# Altium PCB BOOST.PcbDoc
Units mil, origin at the board's own origin, x right, y up, seen from the top; angles counter-clockwise.
Board outline 1058 x 683 mil, 2 copper layers (Top Layer, Bottom Layer); 11 components, 9 nets, 31 pads, 8 vias.
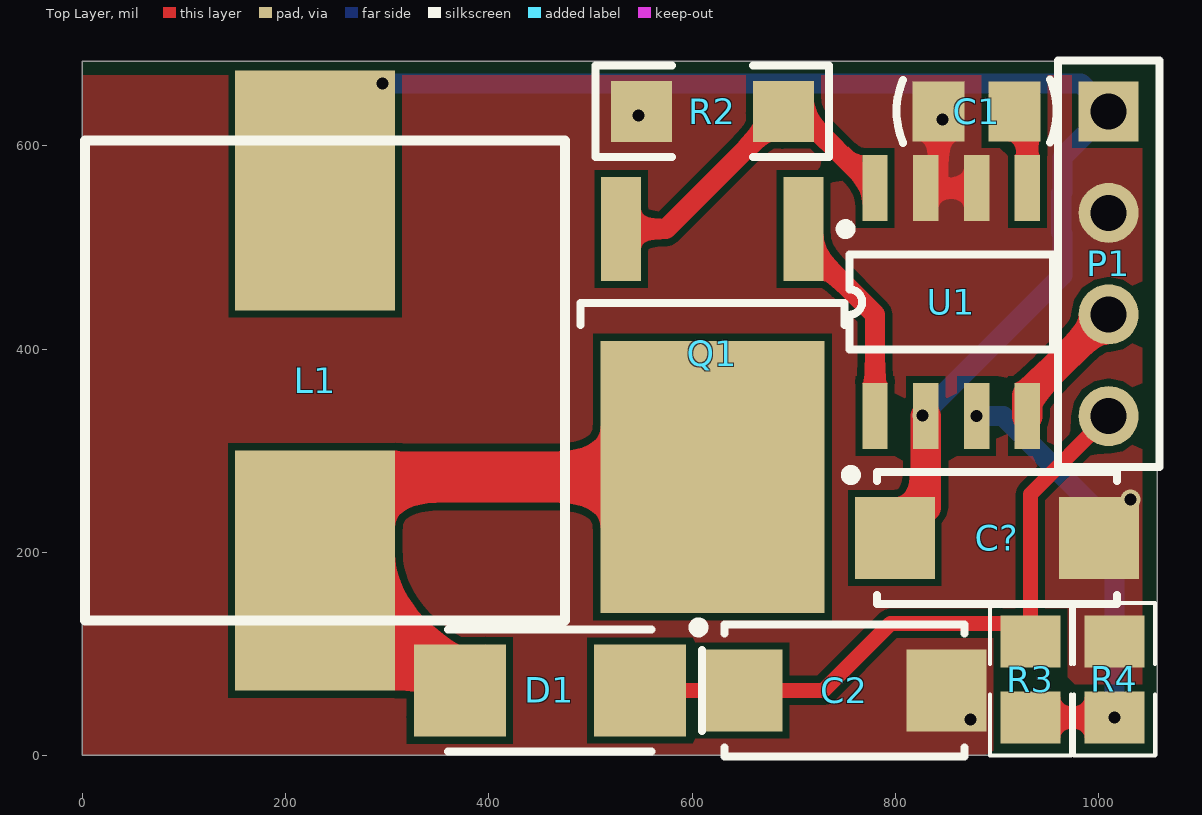
[diagram p0: Top Layer view]
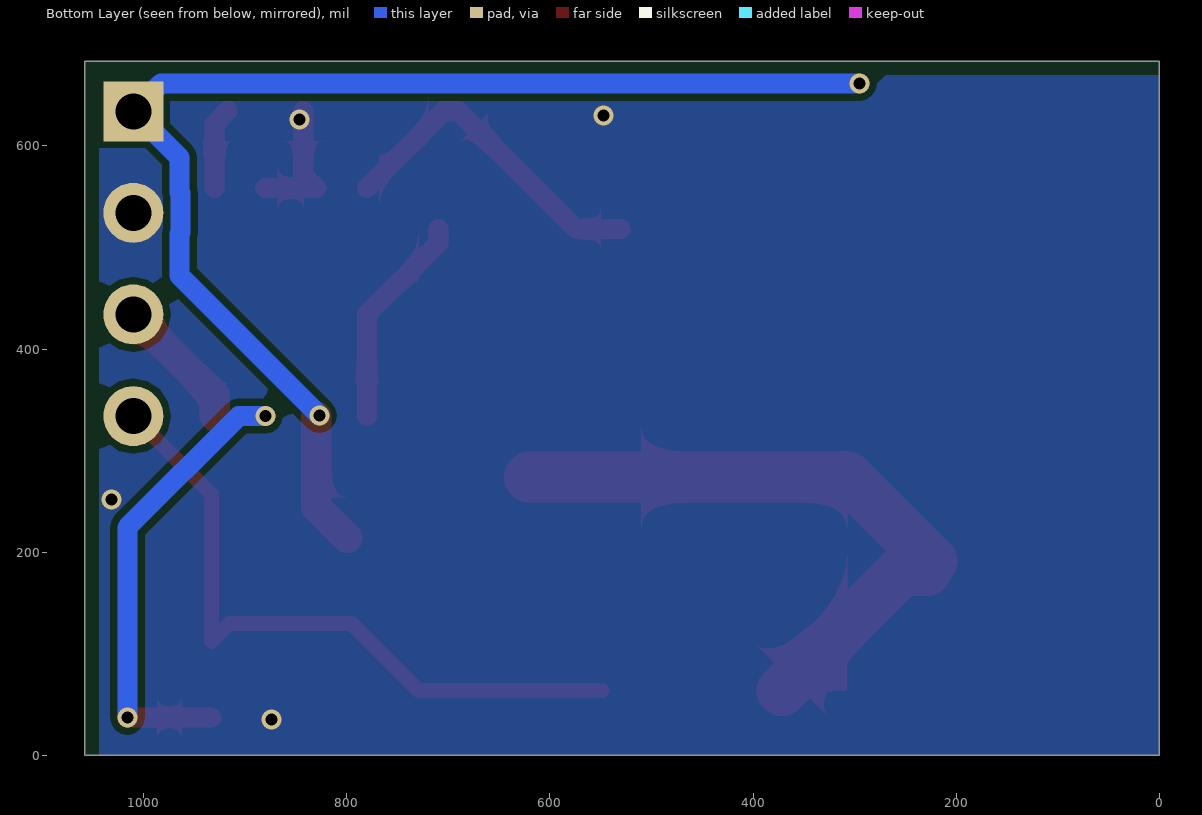
[diagram p1: Bottom Layer view, seen from below]

## Layer stack, top to bottom
Top Solder: solder mask 0.4, Solder Resist, Dk 3.5
Top Layer: signal copper 1.4
Dielectric 1: dielectric 12.6, FR-4, Dk 4.8
Bottom Layer: signal copper 1.4
Bottom Solder: solder mask 0.4, Solder Resist, Dk 3.5

## Board outline
0,0 0,683 1058,683 1058,0

## Design rules (kind name [scope] priority, off if disabled: settings)
Clearance [All] p1: gap=7 ignorepadtopadclearanceinfootprint=FALSE except(0: Arc-Hole Track-Hole SMDPad-Hole THPad-Hole Via-Hole Fill-Hole Poly-Hole Region-Hole Text-Hole)
MinimumSolderMaskSliver [All] p1: minsoldermaskwidth=7
PolygonConnect [All] p1: connectstyle=Direct reliefconductorwidth=118.11 reliefentries=4 polygonreliefangle="90 Angle" airgapwidth=118.11
RoutingCorners [All] p1: cornerstyle=Round minsetback=100 maxsetback=100
RoutingVias [All] p1: holewidth=28 width=50 viastyle="Through Hole" minholewidth=28 minwidth=50 maxholewidth=28 maxwidth=50
SilkToSilkClearance [All] p1 off: silktosilkclearance=10
SilkToSolderMaskClearance [IsPad] p1 off: minsilkscreentomaskgap=10 clearancetoexposedcopper=TRUE
SolderMaskExpansion [All] p1: expansion=4
Width [All] p1: maxlimit=100 minlimit=10 preferedwidth=10
26 further rules are at their usual default settings.

## Components (designator, comment, footprint, x,y, rotation, side; value= is the part's Value field where it differs from the comment)
C1 "100nf/50V/0603" C-RAD-0805 880,634 r180 top
C2 "10uF/10*10/400V" 5032 750,64 r0 top
C? "10uF/10*10/400V" 5032 900,214 r0 top
D1 "D-Schottky" DIODE-SMA 460,64 r0 top
L1 "10*10/150uH" l1212 475.06,605.23 r270 top
P1 "Header 4" HDR1X4_BLUE 1010,634 r270 top
Q1 "MOSFET-N" D-PAK 620,354.71 r270 top
R2 "Res1" 1206 620,634 r0 top value=100K/0603/1%
R3 "Res1" 0805-1 933.07,74.8 r270 top value=100K/0603/1%
R4 "Res1" 0805-1 1015.75,74.8 r90 top value=100K/0603/1%
U1 "MAX1771" sop-8 780,334 r90 top

## Footprints (in the part's own frame and the unit in brackets; to place one, negate y for a bottom-side part, rotate by r counter-clockwise, add the part's x,y. Pads: shape width x height; smd on the part's side, far side on the other; paste and mask are expansions set on the pad)
0805-1 [mm] "贴片带丝印"
  rect 1.3x1.5 smd: 1(-0.95,0) 2(0.95,0)
  silkscreen extent -1.91,-1.02 1.91,1.02, body extent -1.14,-0.51 1.14,0.51, height 1
1206 [mil] "贴片元件"
  rect 60x60 smd: 1(-70,0) 2(70,0)
  silkscreen extent -115,-45 115,45, body extent -75,-35 75,35, height 39
5032 [mm] "XTAL_8M 2-Leads, Body 6.00x3.20mm, IPC Medium Density"
  rect 2x2.05 smd: 1(-2.55,0) 2(2.55,0)
  silkscreen extent -3.77,-1.65 3,1.7, body extent -3,-1.6 3,1.6, height 1.2
C-RAD-0805 [mm] "贴片电容"
  rect 1.3x1.5 smd: 1(-0.95,0) 2(0.95,0)
  silkscreen extent -2,-0.79 2,0.79, body extent -1.27,-0.64 1.27,0.64, height 0.9
D-PAK [mm] "D-PAK, 3-Pads, Body 6.20x6.66mm (max), IPC Medium Density"
  rect 2.6x1 smd: 1(-4.15,2.28) 3(-4.15,-2.28)
  rect 6.8x5.6 smd: 2(2.05,0)
  silkscreen extent -4.27,-3.3 -1.75,3.46, body extent -4.6,-3.3 4.65,3.3, height 2.31
DIODE-SMA [mm] "贴片二极管"
  rect 2.3x2.3 smd: 1(-2.25,0) 2(2.25,0)
  silkscreen extent -2.54,-1.52 3.81,1.52, body extent -2.92,-1.4 2.92,1.4, height 3
HDR1X4_BLUE [mm]
  rect 1.5x1.5 hole 0.9: 1(0,0)
  round 1.5 hole 0.9: 2(2.54,0) 3(5.08,0) 4(7.62,0)
  silkscreen extent -1.27,-1.27 8.89,1.27, body extent -1.27,-1.27 8.89,1.27, height 2
l1212 [mm]
  rect 6x4 smd: 1(1.25,-6.25) 2(10.75,-6.25)
  silkscreen extent 0,-12 12,0
sop-8 [mil]
  rect 65x25 smd: 1(0,0) 2(0,-50) 3(0,-100) 4(0,-150) 5(224.41,-150) 6(224.41,-100) 7(224.41,-50) 8(224.41,0)
  silkscreen extent 65,-175 159,25, body extent -9,-174 229,24, height 63

## Part data
C1: library part C_1
C2 C?: library part CAP
D1: "肖特基二极管", Code_JEDEC=DO-214-AA, LatestRevisionDate=17-Jul-2002, LatestRevisionNote="Re-released for DXP Platform.", PackageReference=SMB, Published=8-Jun-2000, Publisher="Altium Limited", Type=SS14
L1: library part L
P1: "Header, 4-Pin", LatestRevisionDate=17-Jul-2002, LatestRevisionNote="Re-released for DXP Platform.", Publisher="Altium Limited"
Q1: "N-Channel MOSFET", PackageDocument=1995/1996, LatestRevisionDate=17-Jul-2002, LatestRevisionNote="Re-released for DXP Platform.", PackageReference=E3, Published=8-Jun-2000, Publisher="Altium Limited"
R2 R3 R4: "贴片电阻", LatestRevisionDate=17-Jul-2002, LatestRevisionNote="Re-released for DXP Platform.", PackageReference=AXIAL-0.4, Published=8-Jun-2000, Publisher="Altium Limited"

## Via types
v1: diameter 19.68/19.68 (per signal layer), hole 11.81, Top Layer to Bottom Layer, 7 vias
v2: diameter 20/20 (per signal layer), hole 11.81, Top Layer to Bottom Layer, 1 vias

## Nets (pads, with @x,y where several pads share a name; then routed paths per layer and width w, separated by ;. In a path a pad name is that pad's centre, name@x,y a point inside that pad or via, vN(x,y) a via of type N, cw(c..) or ccw(c..) an arc to the next point about the centre after c; other vN are vias at no path point)
12V: C?.1 L1.1 P1.1 U1.2 | length 1234.8
  Top Layer w30: C?.1 830,244.39 U1.2
  Bottom Layer w20: v1(295.28,661.42) 982.58,661.42 P1.1 964.57,588.57 964.57,554.37 963.47,553.27 963.47,514.73 964.57,513.63 964.57,472.44 v2(826.77,334.65)
EN: P1.3 U1.4 | length 133.1
  Top Layer w30: U1.4 930,354 P1.3
GND: C1.2 C2.2 C?.2 P1.2 R2.1 R4.2 U1.6 U1.7 | length 130.8
  Top Layer w20: C1.2 842.6,571.01 U1.7 U1.6
  other v1: 874.02,35.43 1031.5,251.97 846.46,625.98 547.24,629.92
HV: C2.1 D1.2 P1.4 R3.1 | length 672.8
  Top Layer w15: D1.2 C2.1 729.35,64 795.28,129.92 915.35,129.92 R3.1 933.07,257.07 P1.4
NetC1_1: C1.1 U1.5 | length 80.8
  Top Layer w20: C1.1 930,621.4 U1.5
NetD1_1: D1.1 L1.2 Q1.2 | length 621.8
  Top Layer w50: L1.2@223.94,190.77 307.17,274 Q1.2 ; L1.2 253.42,182 D1.1
NetQ1_G: Q1.1 U1.1 | length 213.2
  Top Layer w20: Q1.1 709.76,504.24 780,434 U1.1
NetQ1_S: Q1.3 R2.2 U1.8 | length 329.1
  Top Layer w20: Q1.3 574.09,518.09 R2.2 704.41,634 U1.8
NetR3_2: R3.2 R4.1 U1.3 | length 450.8
  Top Layer w20: R3.2 v1(1015.75,37.4)
  Bottom Layer w20: v1(880,334) 906.16,334 1015.75,224.41 v1(1015.75,37.4)

## Polygon pours and split planes (outlines as drawn)
GND on Bottom Layer "GND_L02_P010" (solid, pour order 10): 0,0 1043.31,0 1043.31,669.29 0,669.29
GND on Bottom Layer "GND_L02_P008" (solid, pour order 8): -19.68,669.29
GND on Top Layer "GND_L01_P012" (solid, pour order 12): 0,0 0,669.29 1043.31,669.29 1043.31,0

## Silkscreen, mask and mechanical layers (free items; w line width, h text height)
Top Paste:
  rectangle: 374.02,610.24 472.44,669.29
Bottom Solder:
  drawing of 6986 lines, arcs and shapes, not listed
  text "Zhihu ID : Sadudu" at 19.68,649.61 h80 r180
  text "Vi" at 905.51,649.61 h70 r180
  text "Zhihu ID : Sadudu" at 98.43,610.24 h0
  text "Love science, love making..." at 19.68,570.87 h80 r180
  text "G" at 905.51,551.18 h70 r180
  text "Nixie clock step-up module." at 19.68,511.81 h80 r180
  text "EN" at 889.76,452.76 h70 r180
  text "12V --> 180V" at 511.81,413.39 h80 r180
  text "Vo" at 889.76,354.33 h70 r180
Mechanical 13:
  the board outline again, w10